# Altium PCB vending_machine_V1.1.PcbDoc
Units mil, origin at the board's own origin, x right, y up, seen from the top; angles counter-clockwise.
Board outline 2407.9 x 2737.9 mil, 2 copper layers (Top Layer, Bottom Layer); 13 components, 20 nets, 84 pads, 11 vias.
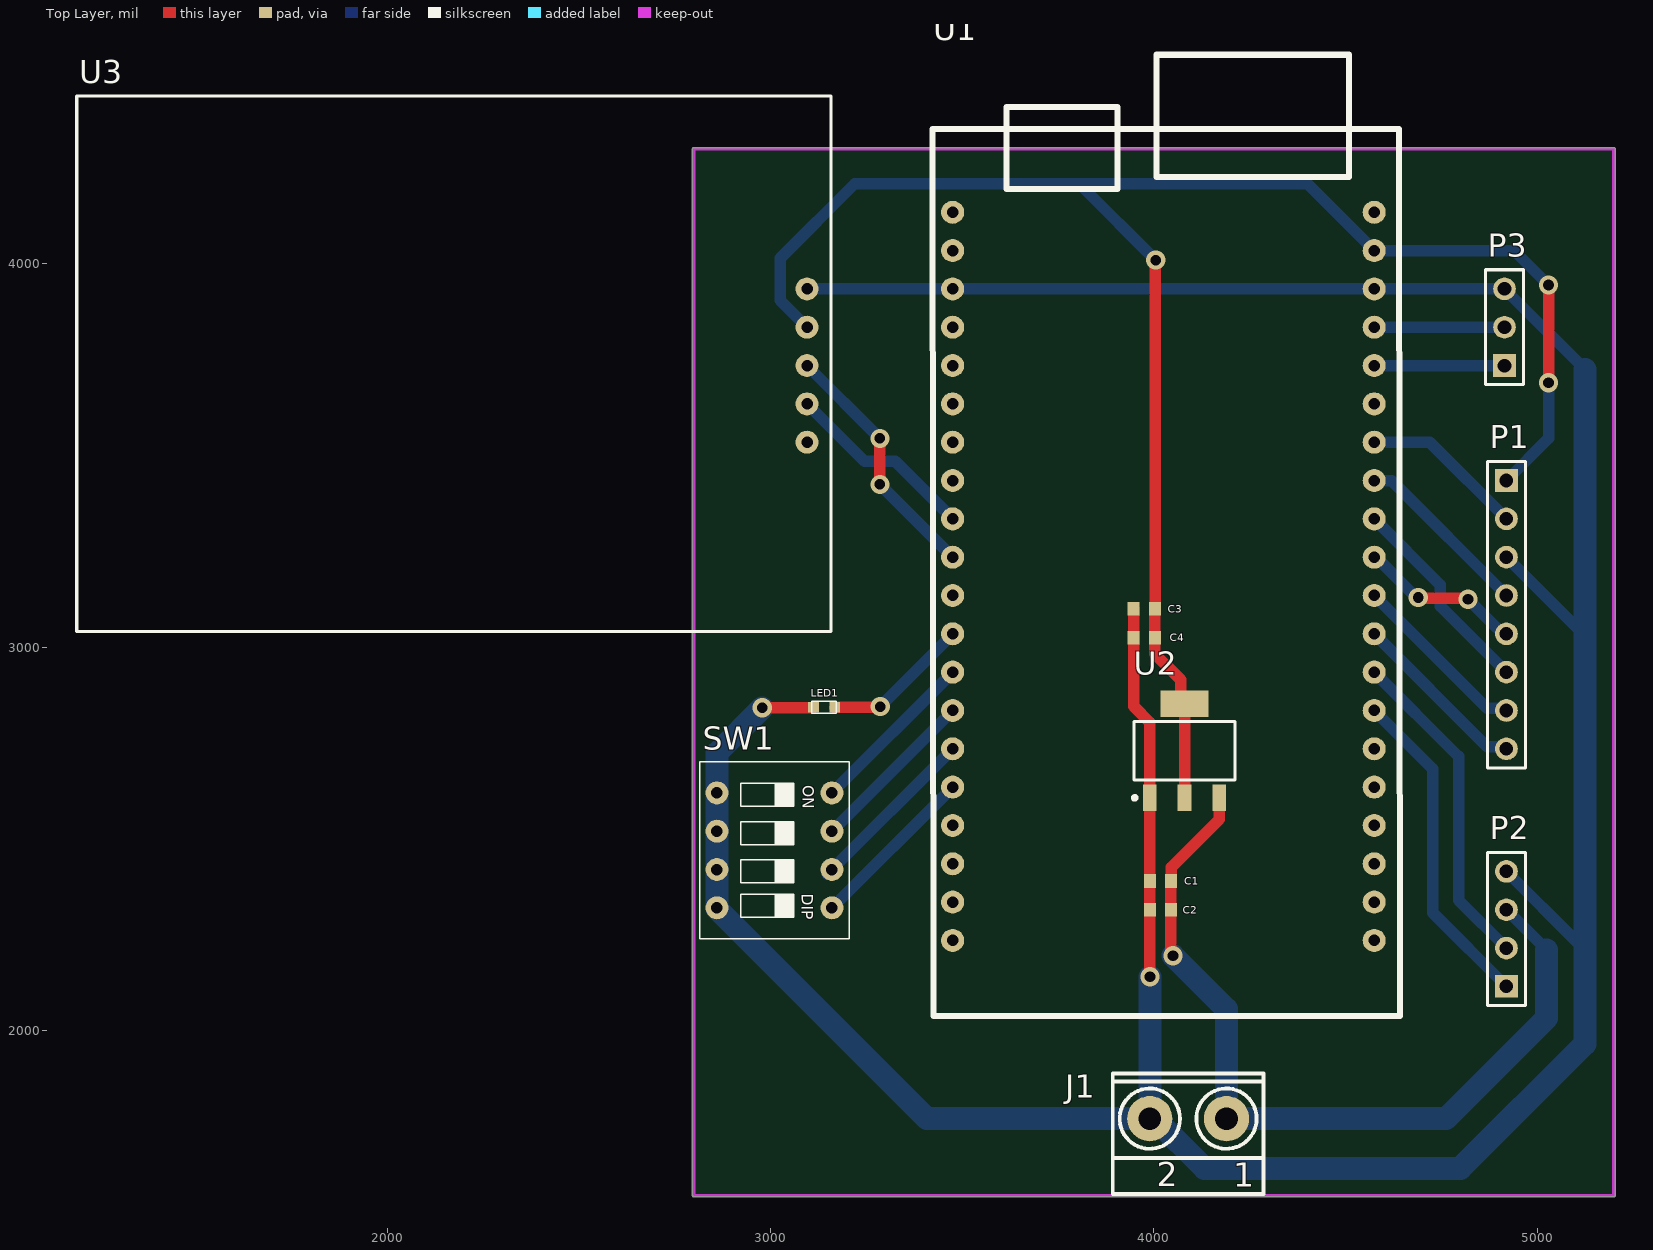
[diagram p0: Top Layer view]
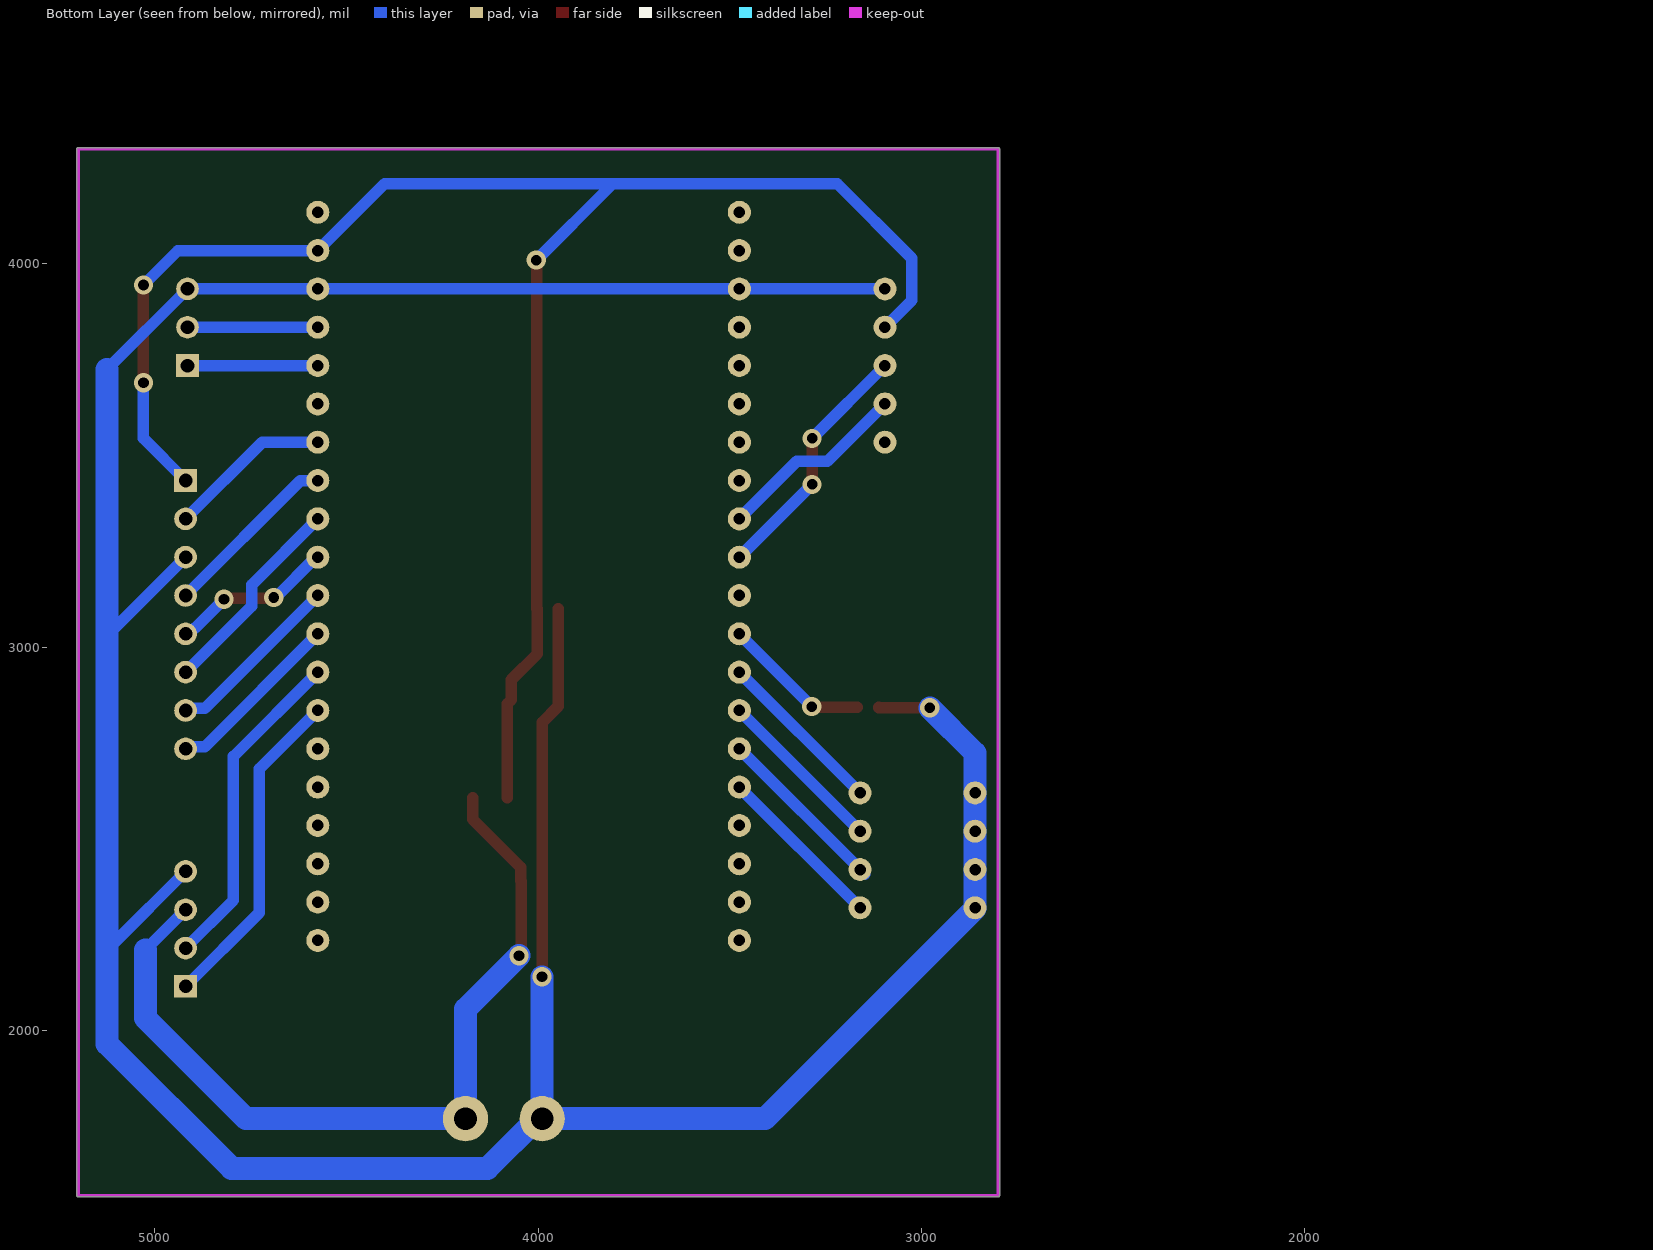
[diagram p1: Bottom Layer view, seen from below]

## Layer stack, top to bottom
Top Solder: solder mask 0.4, Solder Resist, Dk 3.5
Top Layer: signal copper 1.4
Dielectric 1: dielectric 12.6, FR-4, Dk 4.8
Bottom Layer: signal copper 1.4
Bottom Solder: solder mask 0.4, Solder Resist, Dk 3.5

## Board outline
2796.05,1570 ccw(c2800,1570) 2800,1566.05 5200,1566.05 ccw(c5200,1570) 5203.95,1570 5203.95,4300 ccw(c5200,4300) 5200,4303.95 2800,4303.95 ccw(c2800,4300) 2796.05,4300

## Design rules (kind name [scope] priority, off if disabled: settings)
Clearance [All] p1: gap=10 ignorepadtopadclearanceinfootprint=FALSE except(0: Arc-Hole Track-Hole SMDPad-Hole THPad-Hole Via-Hole Fill-Hole Poly-Hole Region-Hole Text-Hole)
ComponentClearance [All] p1 off: gap=10 collisioncheckmode=3 verticalgap=10 showdistances=FALSE
PolygonConnect [All] p1: connectstyle=Relief reliefconductorwidth=10 reliefentries=4 polygonreliefangle="90 Angle" airgapwidth=10
RoutingVias [All] p1: holewidth=28 width=50 viastyle="Through Hole" minholewidth=28 minwidth=50 maxholewidth=28 maxwidth=50
SolderMaskExpansion [All] p1: expansion=4 istentingtop=FALSE
Width [All] p1: maxlimit=60 minlimit=10 preferedwidth=30 toplayer_maxwidth=30 minimp=50.000000 maximp=50.000000 favimp=50.000000
29 further rules are at their usual default settings.

## Components (designator, comment, footprint, x,y, rotation, side; value= is the part's Value field where it differs from the comment)
C1 "Cap Semi" 1608[0603] 4017.01,2390 r0 top value=2.2uF
C2 "Cap Semi" 1608[0603] 4017.01,2315 r0 top value=0.1uF
C3 "Cap Semi" 1608[0603] 3975,3100 r0 top value=2.2uF
C4 "Cap Semi" 1608[0603] 3975,3025 r0 top value=0.1uF
J1 "Terminal_Block" "terminal block" 4008.95,2022.6 r270 top
LED1 "green_light" LED_Green 3167,2843 r180 top
P1 "RFID_SPI" HDR1X8 4920,3435 r270 top
P2 "Header 4" HDR1X4 4920,2115 r90 top
P3 "Transmission" HDR1X3 4915,3735 r90 top
SW1 "DIP_4_Switch" Switch_4 2860,2620 r270 top
U1 "STM32F103" STM32F103 3475,2235 r0 top
U2 "LM1117" "LM1117 - duplicate" 4080,2730 r90 top
U3 "ESP12_F_Module" ESP12_F_Holtek 3157.99,3040.91 r90 top

## Footprints (in the part's own frame and the unit in brackets; to place one, negate y for a bottom-side part, rotate by r counter-clockwise, add the part's x,y. Pads: shape width x height; smd on the part's side, far side on the other; paste and mask are expansions set on the pad)
1608[0603] [mm] "Chip Capacitor, Body 1.6x0.8mm, IPC High Density"
  rect 0.8x0.9 smd: 1(-0.7,0) 2(0.7,0)
  body extent -0.87,-0.48 0.87,0.48, height 1.3
ESP12_F_Holtek [mil] "Holtek_Wi-Fi_module"
  round 60 hole 30: 1(494.09,62.99) 2(594.09,62.99) 3(694.09,62.99) 4(794.09,62.99) 5(894.09,62.99)
  silkscreen extent 0,0 1398,1969
HDR1X3 [mm] "Connector; Header; 3 Position"
  rect 1.5x1.5 hole 0.9: 1(0,0)
  round 1.5 hole 0.9: 2(2.54,0) 3(5.08,0)
  silkscreen extent -1.27,-1.27 6.35,1.27
HDR1X4 [mm] "Connector; Header; 4 Position"
  rect 1.5x1.5 hole 0.9: 1(0,0)
  round 1.5 hole 0.9: 2(2.54,0) 3(5.08,0) 4(7.62,0)
  silkscreen extent -1.27,-1.27 8.89,1.27
HDR1X8 [mm] "Connector; Header; 8 Position"
  rect 1.5x1.5 hole 0.9: 1(0,0)
  round 1.5 hole 0.9: 2(2.54,0) 3(5.08,0) 4(7.62,0) 5(10.16,0) 6(12.7,0) 7(15.24,0) 8(17.78,0)
  silkscreen extent -1.27,-1.27 19.05,1.27
LED_Green [mm] "LED_0603"
  rect 0.7x0.7 smd: 1(0,0) 2(1.4,0)
  silkscreen extent -0.1,-0.4 1.5,0.4
"LM1117 - duplicate" [mm] "SOT223, 4-Leads, Body 6.50x7.00mm (avg), Pitch 2.30mm, IPC Medium Density"
  rect 1.75x0.9 smd: 1(-3.125,2.3) 2(-3.125,0) 3(-3.125,-2.3)
  rect 1.75x3.2 smd: 4(3.125,0)
  silkscreen extent -3.25,-3.35 1.95,3.42, body extent -1.85,-3.35 1.85,3.35, height 1.8
STM32F103 [mil] "STM32F103"
  round 60 hole 30: 1(0,1900) 2(0,1800) 3(0,1700) 4(0,1600) 5(0,1500) 6(0,1400) 7(0,1300) 8(0,1200) 9(0,1100) 10(0,1000) 11(0,900) 12(0,800) 13(0,700) 14(0,600) 15(0,500) 16(0,400) 17(0,300) 18(0,200) 19(0,100) 20(0,0) 21(1100,1900) 22(1100,1800) 23(1100,1700) 24(1100,1600) 25(1100,1500) 26(1100,1400) 27(1100,1300) 28(1100,1200) 29(1100,1100) 30(1100,1000) 31(1100,900) 32(1100,800) 33(1100,700) 34(1100,600) 35(1100,500) 36(1100,400) 37(1100,300) 38(1100,200) 39(1100,100) 40(1100,0)
  silkscreen extent -52,-197 1167,2311
Switch_4 [mil] "DIP_4_Switch"
  round 60 hole 30: 1(0,300) 2(100,300) 3(200,300) 4(300,300) 5(0,0) 6(100,0) 7(200,0) 8(300,0)
  silkscreen extent -81,-45 381,345
"terminal block" [mm]
  round 3 hole 1.5 paste+0 mask+0.051: 1(6.416,4.585) 2(6.416,-0.495)
  silkscreen extent 3.42,-2.96 11.42,7.04

## Part data
C1 C2 C3 C4: "Capacitor (Semiconductor SIM Model)", LatestRevisionDate=29-May-2009, LatestRevisionNote="IPC-7351 Footprint Added.", PackageDescription="Chip Capacitor", PackageReference=C1206, Published=8-Jun-2000, Publisher="Altium Limited"
J1: library part "Terminal Block"
LED1: library part LED_Green
P1: library part "Header 8", "Header, 8-Pin", LatestRevisionDate=17-Jul-2002, LatestRevisionNote="Re-released for DXP Platform.", Publisher="Altium Limited"
P2: "Header, 4-Pin", LatestRevisionDate=17-Jul-2002, LatestRevisionNote="Re-released for DXP Platform.", Publisher="Altium Limited"
P3: library part "Header 3", "Header, 3-Pin", LatestRevisionDate=17-Jul-2002, LatestRevisionNote="Re-released for DXP Platform.", Publisher="Altium Limited"
SW1: library part Switch_4
U3: library part ESP12_F_Holtek

## Via types
v1: diameter 50, hole 28, Top Layer to Bottom Layer, 11 vias

## Nets (pads, with @x,y where several pads share a name; then routed paths per layer and width w, separated by ;. In a path a pad name is that pad's centre, name@x,y a point inside that pad or via, vN(x,y) a via of type N, cw(c..) or ccw(c..) an arc to the next point about the centre after c; other vN are vias at no path point)
3.3V: C3.2 C4.2 P1.1 U1.22 U2.2 U2.4 U3.4 | length 4677
  Top Layer w30: v1(4005,4010) 4003.31,4008.31 4003.31,3100.75 C3.2 C4.2 4002.56,2982.44 4070.09,2914.91 4070.09,2862.94 U2.4 U2.2 ; v1(5030,3690) v1(5030,3945)
  Bottom Layer w30: U3.4 3025,3905 3025,4015 3220,4210 3810,4210 ; v1(4005,4010) 3810,4205 3810,4210 ; P1.1 5030,3545 v1(5030,3690) ; v1(5030,3945) 4940,4035 U1.22 4400,4210 3810,4210
5V: C1.2 C2.2 J1.1 P2.3 U2.3 | length 2219.4
  Top Layer w30: v1(4050,2195) 4050,2200.41 4044.57,2205.84 C1.2 4045.32,2390.75 4045.32,2425.32 4170.55,2550.55 U2.3
  Bottom Layer w30: P2.3 5025,2210
  Bottom Layer w60: v1(4050,2195) 4189.45,2055.55 J1.1 4762.43,1770 5025,2032.57 5025,2210
GND: C1.1 C2.1 C3.1 C4.1 J1.2 LED1.2 P1.3 P2.4 P3.3 SW1.5 SW1.6 SW1.7 SW1.8 U1.3 U1.23 U2.1 U3.5 | length 9186
  Top Layer w30: v1(2978,2842) 3110.88,2842 LED1.2 ; C3.1 C4.1 3947.44,2845.73 3989.45,2803.72 U2.1 C1.1 C2.1 3989.72,2314.72 3989.72,2140.28 v1(3990,2140)
  Bottom Layer w30: U3.5 U1.3 U1.23 P3.3 5125,3725 ; P2.4 5105,2230 5125,2230 ; P1.3 5125,3030 5125,3025
  Bottom Layer w60: SW1.8 SW1.8@2860,2318 ; v1(2978,2842) 2860,2724 SW1.5 SW1.6 SW1.7 SW1.8@2860,2318 ; v1(3990,2140) 3990,1770.55 J1.2 ; 5125,3025 5125,2230 5125,1965 4800,1640 4132.13,1640 4002.13,1770 J1.2 ; 5125,3030 5125,3725 ; SW1.8@2860,2318 3408,1770 J1.2
GPIO_LED1_PA12: LED1.1 U1.12 | length 388.1
  Top Layer w30: LED1.1 3284,2843 v1(3286,2845)
  Bottom Layer w30: v1(3286,2845) 3286,2845.5 3475,3034.5 U1.12
SPI1_MISO_PA6: P1.5 U1.30 | length 427.8
  Top Layer w30: v1(4690,3130) 4692.5,3127.5 4817.5,3127.5 v1(4820,3125)
  Bottom Layer w30: U1.30 4580,3235 4685,3130 v1(4690,3130) ; v1(4820,3125) 4895.47,3049.53 4897.61,3049.53 4912.14,3035 P1.5
SPI1_MOSI_PA7: P1.6 U1.29 | length 542.9
  Bottom Layer w30: U1.29 4747.59,3162.41 4747.59,3107.41 P1.6
SPI1_RST_PB1: P1.2 U1.27 | length 427.8
  Bottom Layer w30: U1.27 4720,3535 P1.2
SPI1_SCK_PA5: P1.7 U1.31 | length 469.3
  Bottom Layer w30: U1.31 4869.44,2840.56 4914.44,2840.56 P1.7
SPI1_SDA_PA4: P1.8 U1.32 | length 469.3
  Bottom Layer w30: U1.32 4869.44,2740.56 4914.44,2740.56 P1.8
SPI1_SS_PB0: P1.4 U1.28 | length 469.3
  Bottom Layer w30: U1.28 4575.53,3434.47 4620.53,3434.47 P1.4
Switch_0_PA15: SW1.1 U1.13 | length 445.5
  Bottom Layer w30: SW1.1 U1.13
Switch_1_PB3: SW1.2 U1.14 | length 445.5
  Bottom Layer w30: SW1.2 U1.14
Switch_2_PB4: SW1.3 U1.15 | length 463.4
  Bottom Layer w30: SW1.3@3147.3,2407.3 U1.15
Switch_3_PB5: SW1.4 U1.16 | length 445.5
  Bottom Layer w30: SW1.4 U1.16
USART1_Rx_PA10: U1.10 U3.3 | length 657.4
  Top Layer w30: v1(3285,3425) v1(3285,3545)
  Bottom Layer w30: U3.3 v1(3285,3545) ; v1(3285,3425) U1.10
USART1_Tx_PA9: U1.9 U3.2 | length 504.3
  Bottom Layer w30: U3.2 3245,3485 3325,3485 U1.9
USART2_Rx_PA3: P2.2 U1.33 | length 862.9
  Bottom Layer w30: U1.33 4795,2715 4795,2340 P2.2
USART2_Tx_PA2: P2.1 U1.34 | length 862.9
  Bottom Layer w30: U1.34 4727.59,2682.41 4727.59,2307.41 P2.1
USART3_Rx_PB11: P3.2 U1.24 | length 340
  Bottom Layer w30: U1.24 P3.2
USART3_Tx_PB10: P3.1 U1.25 | length 340
  Bottom Layer w30: U1.25 P3.1
pads on no net: U1.1 U1.2 U1.4 U1.5 U1.6 U1.7 U1.8 U1.11 U1.17 U1.18 U1.19 U1.20 U1.21 U1.26 U1.35 U1.36 U1.37 U1.38 U1.39 U1.40 U3.1

## Keep-outs
Keep-Out Layer:
  lines w7.87: 2800,1570 5200,1570 5200,4300 2800,4300 2800,1570

## Silkscreen, mask and mechanical layers (free items; w line width, h text height)
Mechanical 13:
  lines w10: 2655,1635 2675,1575 ; 2655,4240 2675,4300 ; 2665,1575 2685,1575 ; 2665,4300 2685,4300 ; 2675,2626.6 2675,1575 ; 2675,3248.4 2675,4300 ; 2695,1635 2675,1575 ; 2695,4240 2675,4300 ; 2800,4465 2800,4485 ; 2860,4455 2800,4475 ; 2860,4495 2800,4475 ; 3714.09,4475 2800,4475 ; 4285.91,4475 5200,4475 ; 5140,4455 5200,4475 ; 5140,4495 5200,4475 ; 5200,4465 5200,4485
  text "60.96 (mm)" at 3724.09,4439.01 h60
  text "69.215 (mm)" at 2710.99,2636.6 h60 r90

## Text inside footprints (layer, text, board x,y; h text height)
J1: Top Overlay "1" at 4207.15,1592.5 h62.99; Top Overlay "2" at 4007.55,1593.8 h62.99
SW1: Top Overlay "DIP" at 3081,2357 h30 r270; Top Overlay "ON" at 3084,2640 h30 r270